# Altium PCB Dust1_carrier_6.PcbDoc
Units mm, origin at the board's own origin, x right, y up, seen from the top; angles counter-clockwise.
Board outline 20 x 20 mm, 6 copper layers (Top Layer (Signal), Layer 1 (GND), Layer 2 (Signal), Layer 3 (PWR), Layer 4 (GND), Bottom Layer (Signal)), stack 1.49 mm thick; 39 components, 37 nets, 184 pads, 90 vias.
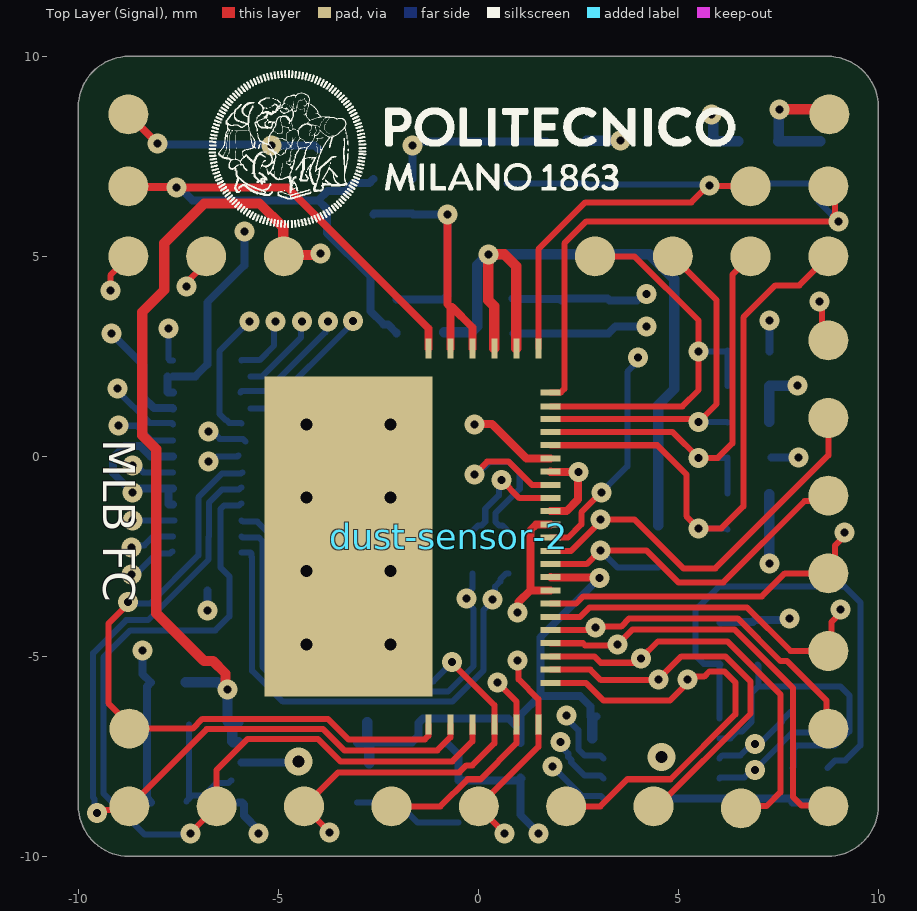
[diagram p0: Top Layer (Signal) view]
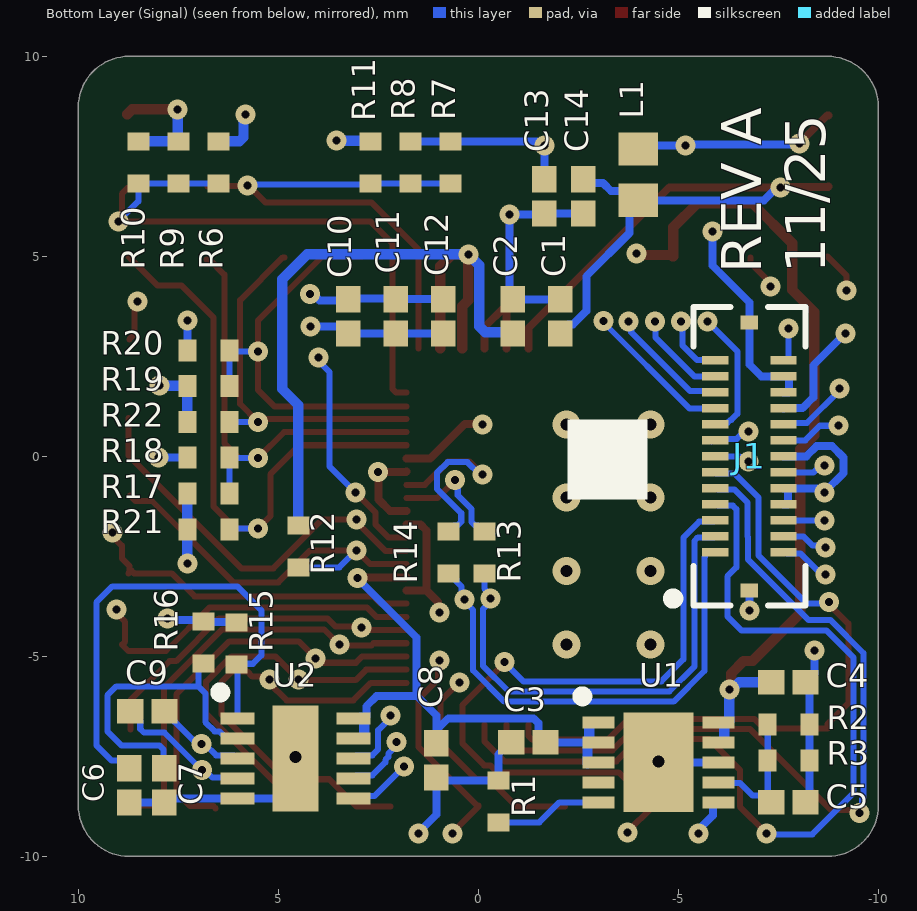
[diagram p1: Bottom Layer (Signal) view, seen from below]
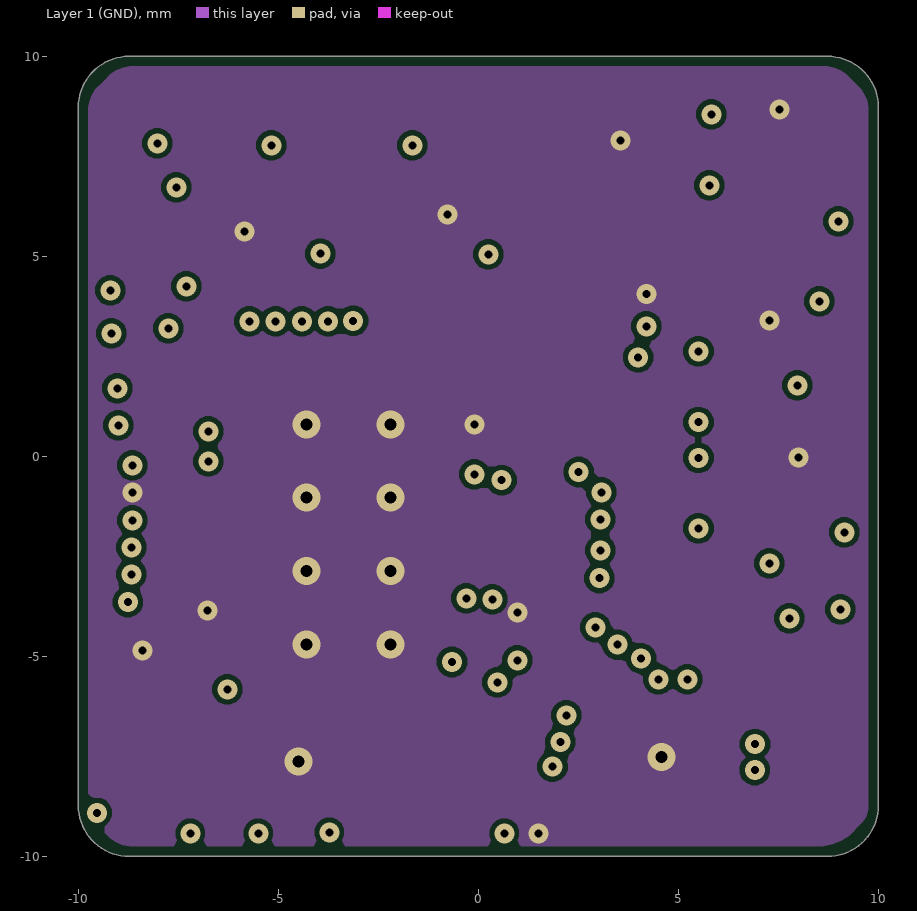
[diagram p2: Layer 1 (GND)]
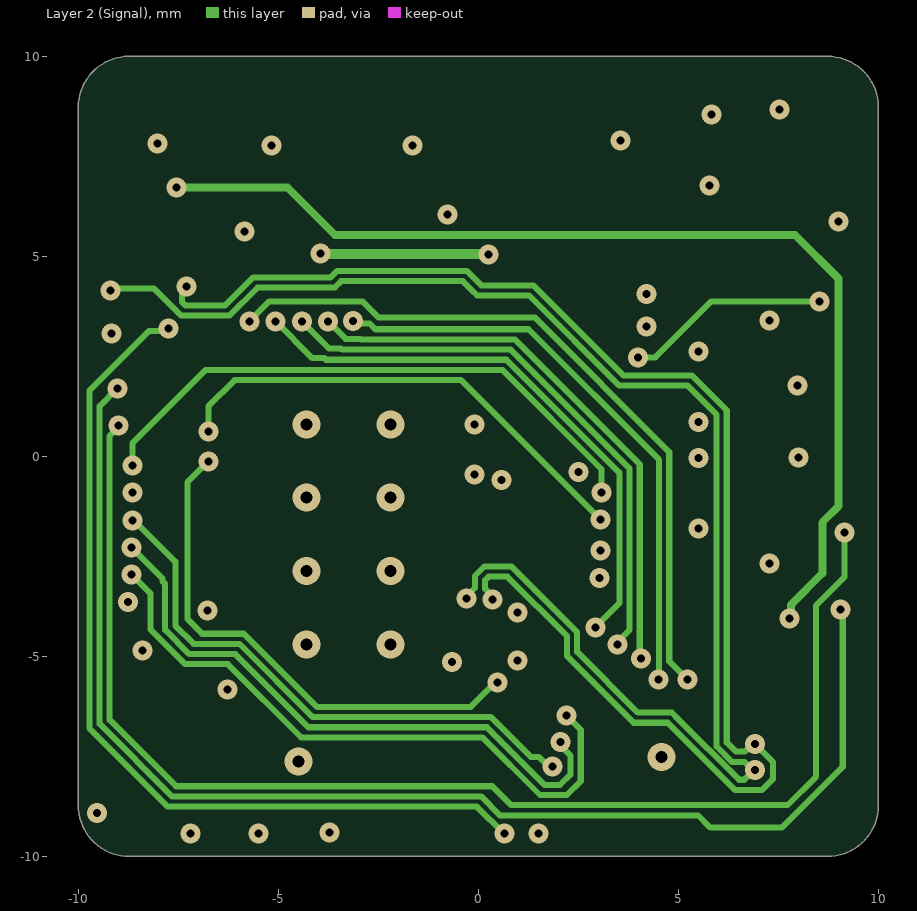
[diagram p3: Layer 2 (Signal)]
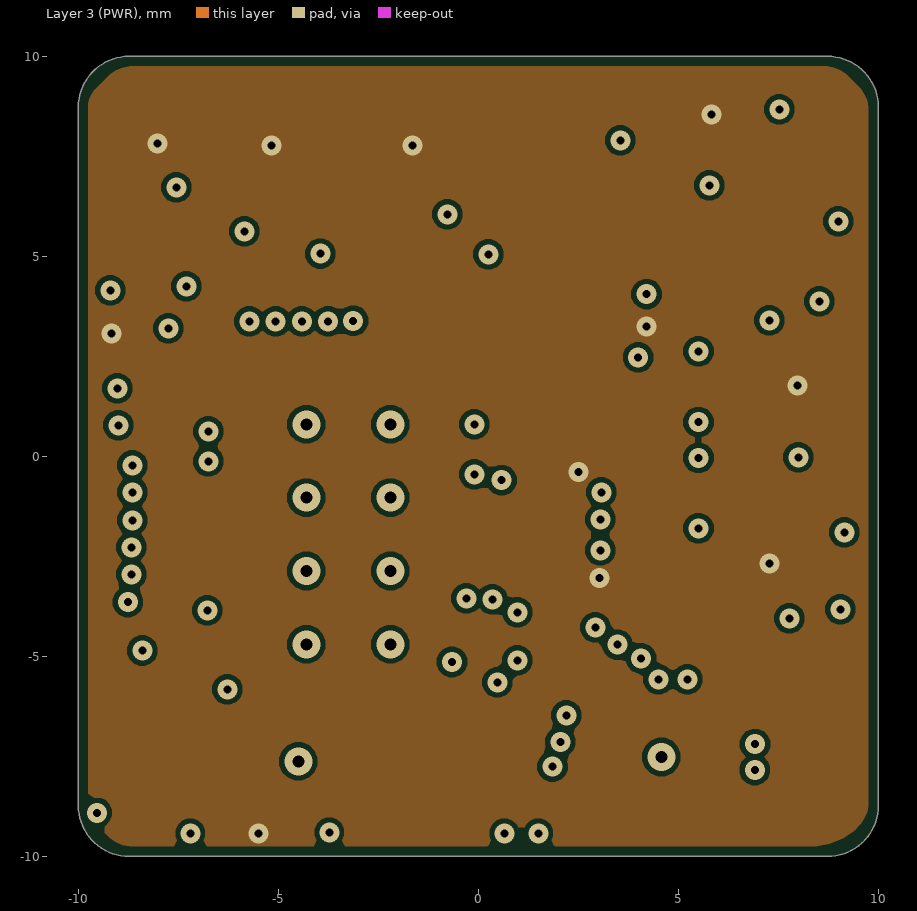
[diagram p4: Layer 3 (PWR)]
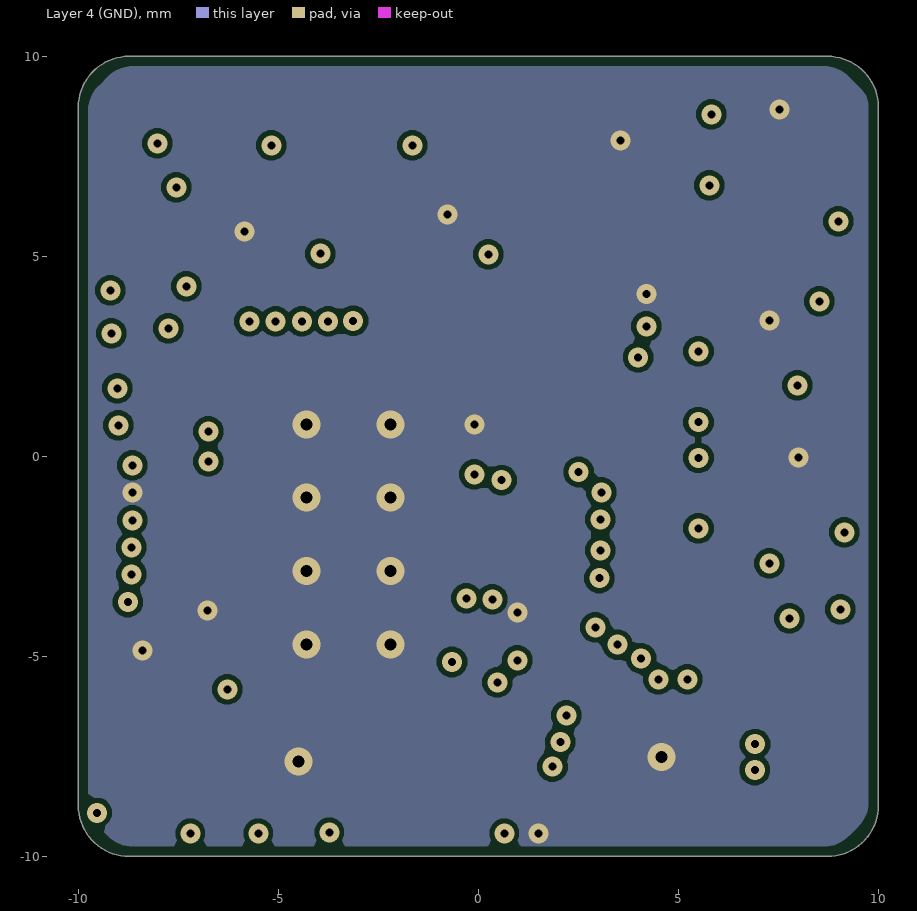
[diagram p5: Layer 4 (GND)]
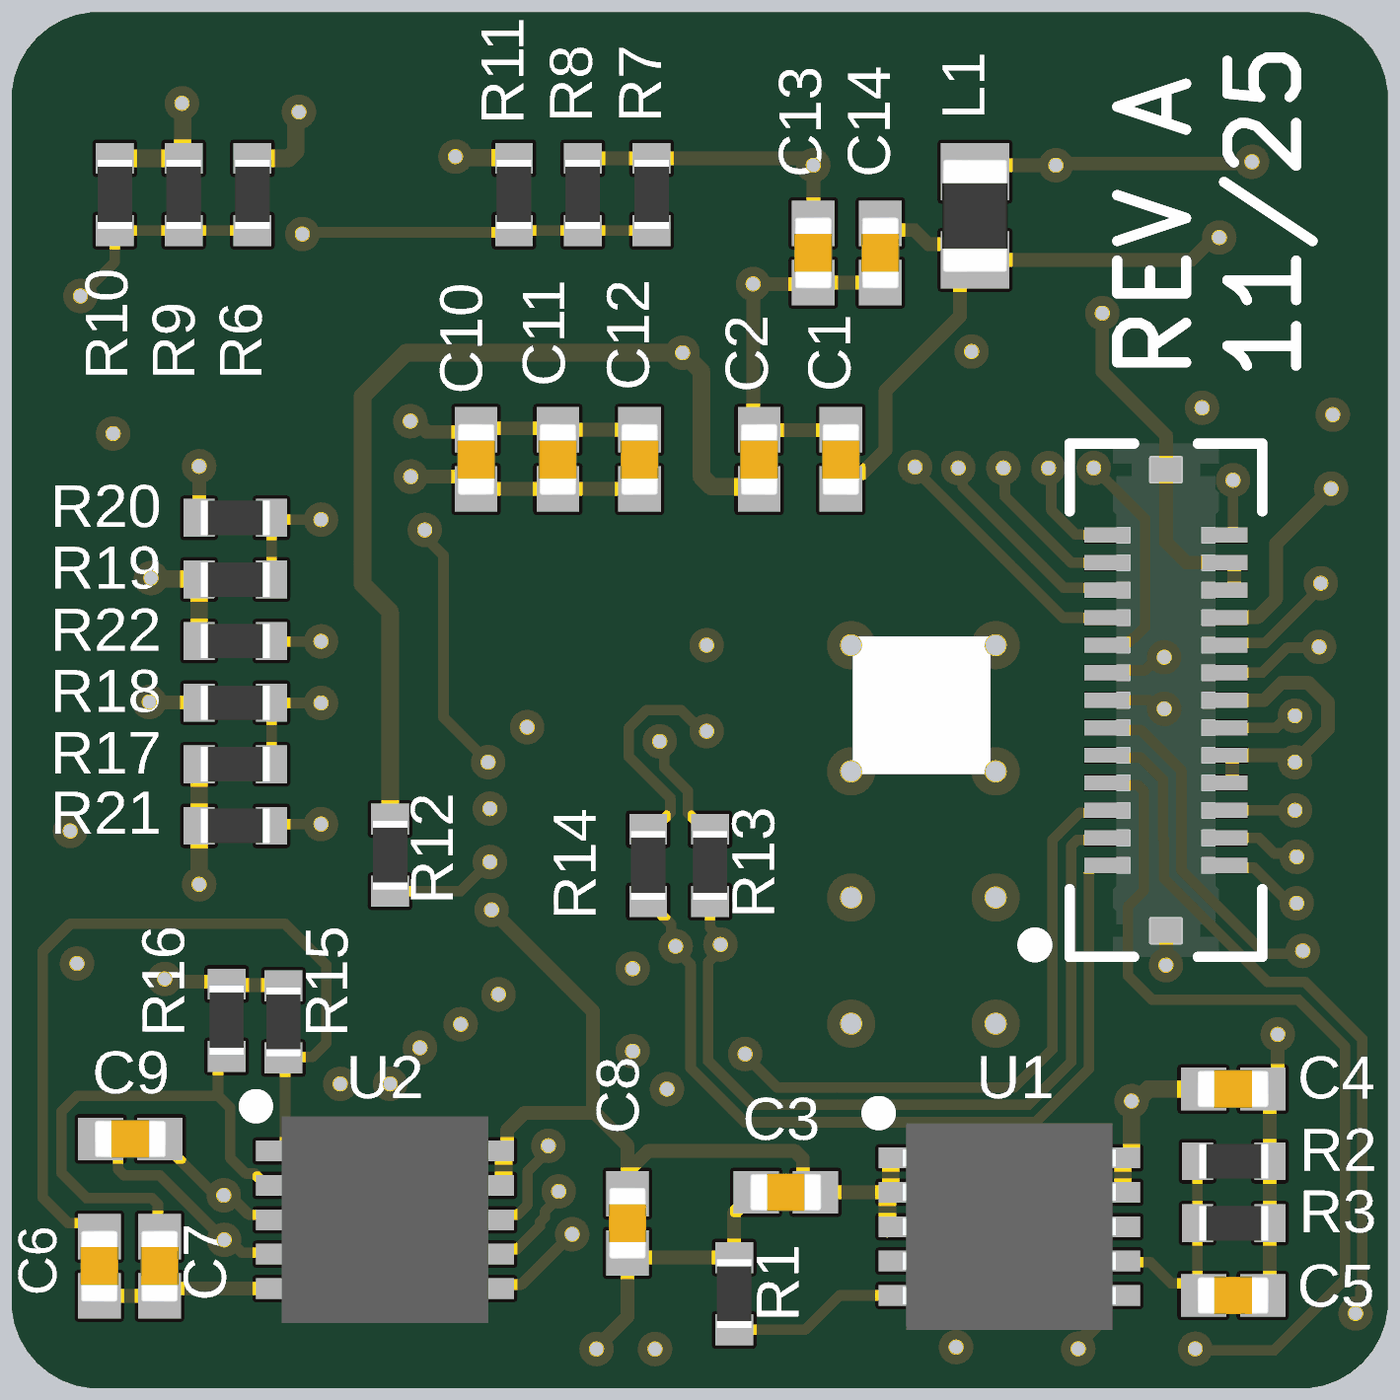
[diagram p6: 3D render of the assembled board from below, using the file's embedded part models]

## Layer stack, top to bottom
Top Solder: solder mask 0.0102, Solder Resist, Dk 3.5
Top Layer (Signal): signal copper 0.0175
Dielectric 2: prepreg 0.1295, PP-017, Dk 4.45
Layer 1 (GND): signal copper 0.035
Dielectric 4: core 0.43, Core-034, Dk 4.6
Layer 2 (Signal): signal copper 0.035
Dielectric 1: prepreg 0.196, PP-021, Dk 4.74
Layer 3 (PWR): signal copper 0.035
Dielectric 5: core 0.43, Core-034, Dk 4.6
Layer 4 (GND): signal copper 0.035
Dielectric 3: prepreg 0.1295, PP-017, Dk 4.45
Bottom Layer (Signal): signal copper 0.0175
Bottom Solder: solder mask 0.0102, Solder Resist, Dk 3.5

## Board outline
-10,-8.73 -10,8.73 cw(c-8.73,8.73) -8.73,10 8.73,10 cw(c8.73,8.73) 10,8.73 10,-8.73 cw(c8.73,-8.73) 8.73,-10 -8.73,-10 cw(c-8.73,-8.73)

## Design rules (kind name [scope] priority, off if disabled: settings)
BoardOutlineClearance [All] p1: gap=0.2 ignorepadtopadclearanceinfootprint=FALSE
Clearance [All] p1: gap=0.102 ignorepadtopadclearanceinfootprint=TRUE except(0.127: Arc-Via Track-Via SMDPad-Via THPad-Via Via-Via Via-Fill Via-Poly Via-Region Via-Text; 0.254: Arc-Hole Track-Hole SMDPad-Hole THPad-Hole Via-Hole Fill-Hole Poly-Hole Region-Hole Text-Hole)
ComponentClearance [All] p1: gap=0.089 collisioncheckmode=3 verticalgap=0.089 showdistances=TRUE
DiffPairsRouting [All] p1: maxlimit=0.305 minlimit=0.102 mostfreqgap=0.102 toplayer_maxgap=0.305 toplayer_minwidth=0.152 toplayer_maxwidth=25.4 toplayer_prefwidth=0.152 midlayer1_minwidth=0.152 midlayer1_maxwidth=25.4 midlayer1_prefwidth=0.152 midlayer2_minwidth=0.152 midlayer2_maxwidth=25.4 midlayer2_prefwidth=0.152 midlayer3_minwidth=0.152 midlayer3_maxwidth=25.4 midlayer3_prefwidth=0.152 midlayer4_minwidth=0.152 midlayer4_maxwidth=25.4 midlayer4_prefwidth=0.152 bottomlayer_minwidth=0.152 bottomlayer_maxwidth=25.4 bottomlayer_prefwidth=0.152 maxuncoupledlength=12.7
Height [All] p1: minheight=0 maxheight=1816.048 prefheight=12.7
HoleSize [All] p1: absolutevalues=TRUE maxlimit=6.3 minlimit=0.2 maxpercent=80.000 minpercent=20.000
HoleToHoleClearance [All] p1: gap=0.254 allowstackedmicrovias=FALSE
MinimumAnnularRing [All] p1: minimumring=0.15
MinimumSolderMaskSliver [All] p1: minsoldermaskwidth=0.152
PlaneClearance [All] p1: clearance=0.089
PlaneConnect PlaneConnectPowerPads [InPadClass('PowerPads')] p1: planeconnectstyle=Direct reliefexpansion=0.508 reliefentries=4 reliefconductorwidth=0.254 reliefairgap=0.254
PlaneConnect [All] p2: pad.planeconnectstyle=Relief pad.reliefexpansion=0.3 pad.reliefentries=4 pad.reliefconductorwidth=0.089 pad.reliefairgap=0.089 via.planeconnectstyle=Direct via.reliefexpansion=0.3 via.reliefentries=4 via.reliefconductorwidth=0.127 via.reliefairgap=0.127
PolygonConnect PolygonConnectPowerPads [All vs (InPadClass('PowerPads'))] p1: connectstyle=Direct reliefconductorwidth=0.254 reliefentries=4 polygonreliefangle="90 Angle" airgapwidth=0.254
PolygonConnect [All] p2: thpad.connectstyle=Relief thpad.reliefconductorwidth=0.089 thpad.reliefentries=4 thpad.polygonreliefangle="90 Angle" thpad.airgapwidth=0.089 smdpad.connectstyle=Relief smdpad.reliefconductorwidth=0.089 smdpad.reliefentries=4 smdpad.polygonreliefangle="90 Angle" smdpad.airgapwidth=0.089 via.connectstyle=Direct via.reliefconductorwidth=0.127 via.reliefentries=4 via.polygonreliefangle="90 Angle" via.airgapwidth=0.127
RoutingVias [All] p1: holewidth=0.2 width=0.45 viastyle="Through Hole" minholewidth=0.2 minwidth=0.45 maxholewidth=6.3 maxwidth=6.55
SilkToSilkClearance [All] p1: silktosilkclearance=0.127
SilkToSolderMaskClearance [IsPad] p1: minsilkscreentomaskgap=0.127 clearancetoexposedcopper=TRUE
SolderMaskExpansion [All] p1: expansion=0.051 istentingtop=FALSE
SupplyNets "Schematic Supply Nets_1" [InNet('TV+')] p1: voltage=0.000
SupplyNets "Schematic Supply Nets" [InNet('GND')] p2: voltage=0.000
UnRoutedNet [All] p1: checkbadconnections=TRUE
Width Power_12mil [InNetClass('Power')] p1: maxlimit=25.4 minlimit=0.2 preferedwidth=0.305 minimp=50.000000 maximp=50.000000 favimp=50.000000
Width Power_20mil [InNetClass('Power')] p2: maxlimit=25.4 minlimit=0.508 preferedwidth=0.508 minimp=50.000000 maximp=50.000000 favimp=50.000000
Width Width_6mil [InNetClass('Signal')] p3: maxlimit=25.4 minlimit=0.152 preferedwidth=0.152 minimp=50.000000 maximp=50.000000 favimp=50.000000
Width Width_3.5mil [InNetClass('Signal')] p4: maxlimit=25.4 minlimit=0.089 preferedwidth=0.089 minimp=50.000000 maximp=50.000000 favimp=50.000000
19 further rules are at their usual default settings.

## Classes and differential pairs
component class Dust1_carrier_6: C1 C2 C3 C4 C5 C6 C8 C9 C10 C11 C12 C13 dust-sensor-2 J1 L1 R1 R2 R3 R6 R7 R8 R9 R10 R11 R12 R13 R14 R15 R16 R17 R18 R19 R20 R21 R22 U1 U2
differential pair OUT1: +OUT1_P -OUT1_N
differential pair OUT: +OUT_P -OUT_N

## Components (designator, comment, footprint, x,y, rotation, side; value= is the part's Value field where it differs from the comment)
C1 "10uF" CAP_0402 -2.05,3.5 r90 bottom
C2 "10uF" CAP_0402 -0.863,3.5 r90 bottom
C3 "4.7uF" CAP_0402 -1.25,-7.15 r180 bottom
C4 "10uF" CAP_0402 -7.75,-5.65 r180 bottom
C5 "4.7uF" CAP_0402 -7.75,-8.65 r0 bottom
C6 "10uF" CAP_0402 8.725,-8.225 r90 bottom
C7 "1uF" CAP_0402 7.85,-8.225 r90 bottom
C8 "1uF" CAP_0402 1.05,-7.6 r270 bottom
C9 "10nF" CAP_0402 8.275,-6.375 r0 bottom
C10 "10uF" CAP_0402 3.25,3.5 r270 bottom
C11 "100nF" CAP_0402 2.062,3.5 r270 bottom
C12 "10uF" CAP_0402 0.875,3.5 r270 bottom
C13 "10uF" CAP_0402 -1.65,6.5 r90 bottom
C14 "10uF" CAP_0402 -2.625,6.5 r90 bottom
dust-sensor-2 "dust-sensor-2" dust-sensor-2-Footprint-1 -1.25,-2 r0 top
J1 "5024302630" CON_5024302630_MOL -6.775,0 r90 bottom
L1 "IND_0603" IND_0603 -4,7.04 r270 bottom
R1 "0Ω" RES_0402 -0.5,-8.625 r270 bottom
R2 "33.2kΩ" RES_0402 -7.76,-6.7 r0 bottom
R3 "33.2kΩ" RES_0402 -7.76,-7.6 r0 bottom
R6 "DNP" RES_0402 6.5,7.35 r90 bottom
R7 "DNP" RES_0402 0.7,7.35 r90 bottom
R8 "DNP" RES_0402 1.7,7.35 r90 bottom
R9 "DNP" RES_0402 7.5,7.35 r270 bottom
R10 "DNP" RES_0402 8.5,7.35 r270 bottom
R11 "DNP" RES_0402 2.7,7.35 r270 bottom
R12 "DNP" RES_0402 4.5,-2.25 r270 bottom
R13 "0Ω" RES_0402 -0.15,-2.4 r90 bottom
R14 "0Ω" RES_0402 0.75,-2.4 r90 bottom
R15 "5Ω" RES_0402 6.05,-4.675 r90 bottom
R16 "5Ω" RES_0402 6.875,-4.65 r90 bottom
R17 "DNP" RES_0402 6.75,-0.93 r0 bottom
R18 "DNP" RES_0402 6.75,-0.035 r180 bottom
R19 "DNP" RES_0402 6.75,1.755 r0 bottom
R20 "DNP" RES_0402 6.75,2.65 r180 bottom
R21 "DNP" RES_0402 6.75,-1.825 r0 bottom
R22 "DNP" RES_0402 6.75,0.86 r0 bottom
U1 "LT3045IDD#PBF" SON50P300X300X80-11N-D -4.5,-7.65 r180 bottom
U2 "ADS8867IDRCT" SON50P300X300X100-11N-D 4.575,-7.55 r180 bottom

## Footprints (in the part's own frame and the unit in brackets; to place one, negate y for a bottom-side part, rotate by r counter-clockwise, add the part's x,y. Pads: shape width x height; smd on the part's side, far side on the other; paste and mask are expansions set on the pad)
CAP_0402 [mm] "Chip Capacitor, 2-Leads, Body 1.00x0.50mm, IPC Medium Density"
  rect 0.66x0.62 smd: 1(-0.43,0) 2(0.43,0)
  body extent -0.53,-0.28 0.53,0.28, height 0.4
CON_5024302630_MOL [mm]
  rect 0.22x0.66 smd paste+0 mask+0.012: 1(-2.4,0.855) 2(-2,0.855) 3(-1.6,0.855) 4(-1.2,0.855) 5(-0.8,0.855) 6(-0.4,0.855) 7(0,0.855) 8(0.4,0.855) 9(0.8,0.855) 10(1.2,0.855) 11(1.6,0.855) 12(2,0.855) 13(2.4,0.855) 14(-2.4,-0.855) 15(-2,-0.855) 16(-1.6,-0.855) 17(-1.2,-0.855) 18(-0.8,-0.855) 19(-0.4,-0.855) 20(0,-0.855) 21(0.4,-0.855) 22(0.8,-0.855) 23(1.2,-0.855) 24(1.6,-0.855) 25(2,-0.855) 26(2.4,-0.855)
  rect 0.35x0.44 smd paste+0 mask+0.025: P1(-3.35,0) P2(3.35,0)
  silkscreen extent -3.73,-1.4 3.73,2.03, body extent -3.73,-1.04 3.73,1.04, height 0.02
dust-sensor-2-Footprint-1 [mm]
  rect 4.2x8 smd paste-20: 0(-2,0)
  rect 0.15x0.5 smd paste-10: 1(0,4.7) 2(0.55,4.7) 3(1.1,4.7) 4(1.65,4.7) 5(2.2,4.7) 6(2.75,4.7) 30(2.75,-4.7) 31(2.2,-4.7) 32(1.65,-4.7) 33(1.1,-4.7) 34(0.55,-4.7) 35(0,-4.7)
  rect 0.5x0.15 smd paste-10: 7(3.05,3.6) 8(3.05,3.25) 9(3.05,2.937) 10(3.05,2.607) 11(3.05,2.277) 12(3.05,1.947) 13(3.05,1.617) 14(3.05,1.287) 15(3.05,0.957) 16(3.05,0.627) 17(3.05,0.297) 18(3.05,-0.033) 19(3.05,-0.363) 20(3.05,-0.693) 21(3.05,-1.023) 22(3.05,-1.353) 23(3.05,-1.683) 24(3.05,-2.013) 25(3.05,-2.343) 26(3.05,-2.673) 27(3.05,-3.003) 28(3.05,-3.333) 29(3.05,-3.663)
  body extent -3.6,-3.4 -0.4,3.4, height 0.8
IND_0603 [mm] "Chip Inductor, 2-Leads, Body 1.55x0.85mm, IPC Medium Density"
  rect 0.83x0.99 smd: 1(-0.64,0) 2(0.64,0)
  body extent -0.82,-0.48 0.82,0.48, height 0.5
RES_0402 [mm] "Chip Resistor, 2-Leads, Body 1.00x0.50mm, IPC Medium Density"
  rect 0.45x0.55 smd: 1(-0.525,0) 2(0.525,0)
  body extent -0.5,-0.25 0.5,0.25, height 0.3
SON50P300X300X80-11N-D [mm]
  rect 0.8x0.3 smd: 1(-1.5,1) 2(-1.5,0.5) 3(-1.5,0) 4(-1.5,-0.5) 5(-1.5,-1) 6(1.5,-1) 7(1.5,-0.5) 8(1.5,0) 9(1.5,0.5) 10(1.5,1)
  rect 1.75x2.48 smd: 11(0,0)
  silkscreen extent -2.02,1.53 -1.78,1.77, body extent -1.55,-1.5 1.55,1.5, height 0.8
SON50P300X300X100-11N-D [mm]
  rect 0.85x0.3 smd: 1(-1.45,1) 2(-1.45,0.5) 3(-1.45,0) 4(-1.45,-0.5) 5(-1.45,-1) 6(1.45,-1) 7(1.45,-0.5) 8(1.45,0) 9(1.45,0.5) 10(1.45,1)
  rect 1.15x2.65 smd: 11(0,0)
  silkscreen extent -2,1.53 -1.75,1.77, body extent -1.5,-1.5 1.5,1.5, height 1

## Part data
C1 C2 C3 C4 C5 C6 C7 C8 C9 C10 C11 C12 C13 C14: library part CMP-001-00099-1, Design Item ID=CAP_0402, Source=CAP_0402.SchLib
dust-sensor-2: library part CMP-010-00025-11, "dust-sensor-v2-2025"
J1: library part CMP-097-000000-5, "SlimStack Board-to-Board Plug, 0.40mm Pitch, Surface Mount, Dual Row, Vertical Stacking, 1.00mm Stacking Height, with Solder Tabs, with Vacuum  Tape, 26 Circuits", Manufacturer_Name="Molex Connector Corporation", Copyright="Copyright (C) 2025 Ultra Librarian. All rights reserved.", Design Item ID=5024302630, Manufacturer_Part_Number=5024302630, RefDes=RefDes, Source=5024302630.SchLib, Type=Type
L1: library part CMP-006-00026-1, "Generic 0603 Inductor", Design Item ID=IND_0603, Source=IND_0603.SchLib
R1 R2 R3 R6 R7 R8 R9 R10 R11 R12 R13 R14 R15 R16 R17 R18 R19 R20 R21 R22: library part CMP-009-00192-1, "Resistor SMD 0402 Generic", Design Item ID=RES_0402, Source=RES_0402.SchLib
U1: library part CMP-111-000001-2, "Linear Technology LT3045IDD#PBF, LDO Regulator, 500mA Adjustable, 0  15 V, +/-1% 10-Pin, DFN", Manufacturer_Name="Analog Devices", Mouser Part Number=584-LT3045IDD#PBF, Arrow Part Number=LT3045IDD#PBF, Arrow Price/Stock=https://www.arrow.com/en/products/lt3045iddpbf/analog-devices?utm_currency=USD&region=nac, Datasheet Link=https://www.analog.com/media/en/technical-documentation/data-sheets/3045fa.pdf, Design Item ID=LT3045IDD#PBF, Geometry.Height=0.8mm, Manufacturer_Part_Number=LT3045IDD#PBF, Mouser Price/Stock=https://www.mouser.co.uk/ProductDetail/Analog-Devices/LT3045IDDPBF?qs=oahfZPh6IAL0HQTYgxXgGA%3D%3D, Source=LT3045IDD#PBF.SchLib
U2: library part CMP-00018-2, "16-Bit, 100-kSPS, Serial Interface, microPower, Miniature, Truly-Differential Input, SAR ADC", Manufacturer_Name="Texas Instruments", Mouser Part Number=595-ADS8867IDRCT, Datasheet Link=http://www.ti.com/lit/gpn/ADS8867, Design Item ID=ADS8867IDRCT, Geometry.Height=1mm, Manufacturer_Part_Number=ADS8867IDRCT, Mouser Price/Stock=https://www.mouser.co.uk/ProductDetail/Texas-Instruments/ADS8867IDRCT?qs=P6JsaOY39iimBkK0NU%2FcVg%3D%3D, Source=ADS8867IDRCT.SchLib

## Free pads (board coordinates)
  round 1 smd paste-2539.97: ""(-8.75,5) ""(-8.75,6.75) ""(-8.75,8.55) ""(-8.725,-8.75) ""(-8.725,-6.808) ""(-6.806,5) ""(-6.541,-8.75) ""(-4.861,5) ""(-4.356,-8.75) ""(-2.172,-8.75) ""(0.013,-8.75) ""(2.197,-8.75) ""(2.917,5) ""(4.381,-8.75) ""(4.861,5) ""(6.566,-8.8) ""(6.806,5) ""(6.806,6.75) ""(8.75,-6.808) ""(8.75,-4.867) ""(8.75,0.958) ""(8.75,-2.925) ""(8.75,-0.983) ""(8.75,-8.75) ""(8.75,2.9) ""(8.75,5) ""(8.75,6.75) ""(8.775,8.55)

## Via types
v1: diameter 0.5, hole 0.2, Top Layer (Signal) to Bottom Layer (Signal), tented both sides, 80 vias
v2: diameter 0.7, hole 0.3, Top Layer (Signal) to Bottom Layer (Signal), tented bottom, 8 vias
v3: diameter 0.7, hole 0.3, Top Layer (Signal) to Bottom Layer (Signal), tented top, 2 vias

## Nets (pads, with @x,y where several pads share a name; then routed paths per layer and width w, separated by ;. In a path a pad name is that pad's centre, name@x,y a point inside that pad or via, vN(x,y) a via of type N, cw(c..) or ccw(c..) an arc to the next point about the centre after c; other vN are vias at no path point)
2CKpad: dust-sensor-2.35 J1.6 pad.@-8.725,-6.808 | length 16.8
  Top Layer (Signal) w0.152: v1(-8.763,-3.643) -8.763,-3.695 -9.25,-4.182 -9.25,-6.17 -8.725,-6.695 -8.725,-6.808 -7.143,-6.808 -6.898,-6.564 -3.761,-6.564 -3.25,-7.075 -1.339,-7.075 -1.25,-6.986 dust-sensor-2.35
  Bottom Layer (Signal) w0.152: v1(-8.763,-3.643) -8.723,-3.683 -8.208,-3.683 -7,-2.475 -7,-1.025 -6.409,-0.434 -5.934,-0.434 J1.6@-5.9,-0.4
CKpad: dust-sensor-2.34 J1.5 pad.@-8.725,-8.75 | length 20.7
  Top Layer (Signal) w0.152: v1(-9.53,-8.911) -9.464,-8.844 -8.819,-8.844 -6.793,-6.818 -3.882,-6.818 -3.35,-7.35 -1.025,-7.35 -0.7,-7.025 dust-sensor-2.34
  Bottom Layer (Signal) w0.152: v1(-9.53,-8.911) -9.597,-8.844 -9.597,-8.563 -9.629,-8.53 -9.629,-4.92 -8.805,-4.096 -8.258,-4.096 -6.746,-2.584 -6.746,-2.021 -6.734,-2.009 -6.734,-1.159 -6.409,-0.834 -5.984,-0.834 J1.5@-5.925,-0.775
DCC_counter: dust-sensor-2.32 J1.3 pad.@-4.356,-8.75 | length 17.7
  Top Layer (Signal) w0.152: v1(-3.725,-9.4) -3.725,-9.391 -4.356,-8.759 -4.356,-8.75 -3.506,-7.9 -0.475,-7.9 -0.3,-7.725 -0.146,-7.725 0.4,-7.179 dust-sensor-2.32 0.4,-6.221 -0.659,-5.162 v1(-0.659,-5.141)
  Bottom Layer (Signal) w0.152: J1.3 -5.886,-1.634 -5.524,-1.634 -5.125,-2.033 -5.125,-5.075 -4.575,-5.625 -1.125,-5.625 -0.659,-5.159 v1(-0.659,-5.141)
DCC_sel: dust-sensor-2.31 J1.7 pad.@-2.172,-8.75 | length 19.2
  Top Layer (Signal) w0.152: pad.@-2.172,-8.75 -0.946,-8.75 -0.268,-8.072 0.056,-8.072 0.95,-7.179 dust-sensor-2.31@0.95,-6.874 ; v1(0.476,-5.651) 0.95,-6.125 dust-sensor-2.31
  Layer 2 (Signal) w0.152: v1@-6.775,-0.15 -7.275,-0.65 -7.275,-4.064 -6.904,-4.435 -5.865,-4.435 -4.036,-6.264 -0.189,-6.264 0.424,-5.651 v1(0.476,-5.651)
  Bottom Layer (Signal) w0.152: v1(-6.75,-0.125) -6.656,-0.125 -6.531,0 -6.025,0 J1.7@-6,0.025
Gm_Ca: dust-sensor-2.9 pad.@4.861,5 R22.1 | length 9.2
  Top Layer (Signal) w0.152: dust-sensor-2.9 5.328,0.937 5.39,0.875 v1@5.5,0.875 ; pad.@4.85,4.975 4.886,4.975 5.957,3.904 5.957,1.308 v1(5.504,0.855)
  Bottom Layer (Signal) w0.152: v1(5.504,0.855) 6.22,0.855 R22.1@6.225,0.85
Gm_Cb: dust-sensor-2.8 pad.@2.917,5 R19.1 R20.2 | length 10.5
  Top Layer (Signal) w0.152: dust-sensor-2.8 5.1,1.25 5.504,1.654 v1(5.504,2.625) 5.504,3.399 3.909,4.994 pad.@2.906,4.994
  Bottom Layer (Signal) w0.152: v1(5.504,2.625) R20.2@6.225,2.625 ; R19.1 R20.2
GND: C1.2 C2.2 C3.1 C4.2 C5.1 C6.1 C7.1 C8.2 C10.1 C11.1 C12.1 C13.1 C14.1 dust-sensor-2.0 dust-sensor-2.2 dust-sensor-2.3 dust-sensor-2.12 dust-sensor-2.17 dust-sensor-2.22 J1.17 J1.18 J1.20 J1.24 J1.25 J1.P1 J1.P2 pad.@8.775,8.55 R1.1 R2.1 R3.1 R9.1 R10.1 R11.1 R18.1 R20.1 U1.8 U1.11 U2.5 U2.11 | length 48.2
  Top Layer (Signal) w0.2: v1(-0.775,6.05) -0.775,3.809 -0.7,3.734 dust-sensor-2.2 ; -0.659,3.734 -0.15,3.225 dust-sensor-2.3 ; v1@-0.05,0.825 -0.036,0.811 0.339,0.811 1.203,-0.053 dust-sensor-2.12 ; v1@0.95,-3.9 1.007,-3.843 1.007,-3.643 1.298,-3.351 dust-sensor-2.22 dust-sensor-2.22 ; 1.3,-3.35 1.3,-1.85 1.447,-1.703 dust-sensor-2.17
  Top Layer (Signal) w0.254: v1(7.525,8.675) 8.65,8.675 pad.@8.775,8.55
  Bottom Layer (Signal) w0.2: v1(-8.4,-4.856) -8.4,-5.44 -8.19,-5.65 C4.2 -8.285,-5.755 R3.1 ; R3.1@-8.285,-7.64 -8.285,-8.545 C5.1 ; J1.25@-7.775,2 -7.765,1.99 -7.765,1.61 -7.755,1.6 J1.24 ; J1.18@-7.74,-0.81 -7.74,-1.19 -7.73,-1.2 J1.17 ; J1.18@-7.74,-0.8 J1.18 -8.469,-0.8 -8.569,-0.9 v1(-8.65,-0.9) -9.127,-0.423 -9.127,-0.027 -8.848,0.252 -8.452,0.252 -8.2,0 J1.20 ; J1.25 -7.075,2 -6.775,2.3 J1.P2 -6.775,3.85 -5.85,4.775 v1(-5.85,5.625) ; v1(-6.775,-3.85) J1.P1 ; U1.8@-5.915,-7.65 U1.11 v3(-4.5,-7.625) ; C14.1@-2.625,6.05 -2.605,6.07 C13.1 -1.63,6.05 v1(-0.775,6.05) -0.775,4.017 C2.2 ; C1.2@-2.05,3.925 C2.2@-0.85,3.925 ; C3.1@-0.8,-7.175 -0.775,-7.175 -0.5,-7.45 R1.1 1.025,-8.1 C8.2@1.075,-8.05 ; C12.1@0.85,3.95 0.87,3.93 C11.1 ; C8.2 1.05,-8.959 1.5,-9.409 v1(1.5,-9.428) ; C11.1@2.075,3.9 2.125,3.95 3.23,3.95 3.28,3.9 3.969,3.9 4.125,4.056 v1(4.206,4.056) ; U2.11@4.625,-8.525 4.65,-8.55 U2.5 C7.1@7.85,-8.55 ; R20.1@7.275,2.625 v1(7.275,3.4) ; R18.1@7.325,-0.025 7.33,-0.03 7.995,-0.03 v1(8,-0.025) ; C7.1 C6.1@8.75,-8.655
  Bottom Layer (Signal) w0.254: R11.1 2.713,7.888 3.538,7.888 v1(3.55,7.9) ; v1(7.525,8.675) 7.512,8.662 7.512,7.887 R9.1 R10.1@8.55,7.875
  other v1: 0.975,-3.9 -0.1,0.8
  other v2: -4.3,-4.7 -2.2,-4.7 -4.3,-2.867 -2.2,-2.867 -4.3,-1.033 -2.2,-1.033 -4.3,0.8 -2.2,0.8
  other v3: 4.575,-7.519
HFb1: dust-sensor-2.23 J1.21 pad.@8.75,-2.925 | length 42.6
  Top Layer (Signal) w0.152: dust-sensor-2.23 2.442,-3.683 2.625,-3.5 7.091,-3.5 7.666,-2.925 8.604,-2.925 pad.@8.629,-2.9 ; pad.@8.75,-2.925 8.677,-2.852 8.717,-2.852 8.717,-2.745 8.912,-2.549 8.912,-2.232 9.15,-1.994 v1(9.15,-1.9)
  Layer 2 (Signal) w0.152: v1(-9,0.775) -9,0.728 -9.216,0.512 -9.216,-6.586 -7.554,-8.248 0.348,-8.248 0.821,-8.721 7.729,-8.721 8.444,-8.006 8.444,-3.725 9.15,-3.018 v1(9.15,-1.9)
  Bottom Layer (Signal) w0.152: v1(-9,0.775) -8.989,0.764 -8.539,0.764 -8.175,0.4 J1.21
HFb2: dust-sensor-2.24 J1.22 pad.@8.75,-4.867 | length 43.4
  Top Layer (Signal) w0.152: dust-sensor-2.24 2.546,-4.013 2.784,-3.775 6.716,-3.775 7.808,-4.867 8.75,-4.867 8.908,-4.708 8.831,-4.631 8.831,-4.138 9.05,-3.919 v1(9.05,-3.825)
  Layer 2 (Signal) w0.152: v1(-9.025,1.7) -9.47,1.255 -9.47,-6.691 -7.659,-8.502 0.068,-8.502 0.541,-8.975 5.492,-8.975 5.802,-9.284 7.591,-9.284 9.111,-7.764 9.111,-3.887 v1(9.05,-3.825)
  Bottom Layer (Signal) w0.152: v1(-9.025,1.7) -9.025,1.642 -8.217,0.834 -7.664,0.834 J1.22
NetC5_2: C5.2 R2.2 R3.2 U1.7 | length 3.3
  Bottom Layer (Signal) w0.152: R3.2 -7.235,-8.56 -7.3,-8.625 -7.151,-8.476 -6.851,-8.476 -6.539,-8.164 -6.241,-8.164 U1.7@-6.177,-8.1 ; R3.2@-7.235,-7.565 R2.2
NetC6_2: C6.2 R15.1 U2.1 | length 12.4
  Bottom Layer (Signal) w0.152: U2.1 R15.1@6.025,-5.2 ; R15.1 6.036,-5.186 5.636,-5.186 5.425,-4.975 5.425,-3.85 6.025,-3.25 9.15,-3.25 9.55,-3.65 9.55,-7.225 9.174,-7.601 8.919,-7.601 C6.2
NetC7_2: C7.2 R16.1 U2.2 | length 7.8
  Bottom Layer (Signal) w0.152: U2.2 6.3,-7.05 6.472,-6.878 6.593,-6.878 6.825,-6.646 6.825,-5.925 7,-5.75 ; R16.1@6.975,-5.2 7,-5.225 7,-5.75 ; C7.2 7.874,-7.771 7.874,-7.326 7.966,-7.234 8.916,-7.234 9.275,-6.875 9.275,-5.975 9.05,-5.75 7,-5.75
Netdust-sensor-2_20: dust-sensor-2.20 pad.@8.75,-0.983 R12.2 | length 9.9
  Top Layer (Signal) w0.152: dust-sensor-2.20 2.707,-2.693 v1@3.025,-2.375 ; v1(3.05,-2.35) 4.2,-2.35 5,-3.15 6.125,-3.15 8.158,-1.117 8.575,-1.117 pad.@8.708,-0.983
  Bottom Layer (Signal) w0.152: v1(3.05,-2.35) 3.475,-2.775 R12.2
NetR1_2: R1.2 U1.5 | length 2.7
  Bottom Layer (Signal) w0.152: U1.5@-3.029,-8.65 -2.025,-8.65 -1.525,-9.15 R1.2
OUT1_N: dust-sensor-2.15 R13.2 | length 3
  Top Layer (Signal) w0.152: v1(0.581,-0.597) 1.027,-1.043 dust-sensor-2.15
  Bottom Layer (Signal) w0.152: R13.2 -0.001,-1.726 0.084,-1.726 0.173,-1.637 0.173,-1.316 0.515,-0.974 0.515,-0.664 v1(0.581,-0.597)
OUT1_P: dust-sensor-2.14 R14.2 | length 5.5
  Top Layer (Signal) w0.152: v1(-0.1,-0.45) 0.218,-0.132 0.757,-0.132 1.338,-0.713 dust-sensor-2.14
  Bottom Layer (Signal) w0.152: v1(-0.1,-0.45) -0.035,-0.45 0.271,-0.144 0.769,-0.144 1.035,-0.41 1.035,-0.814 0.427,-1.421 0.427,-1.637 0.516,-1.726 0.601,-1.726 R14.2
OUT_N: C9.2 J1.2 pad.@-8.75,5 R13.1 U2.4 | length 53.6
  Top Layer (Signal) w0.152: v1(-9.2,4.15) -9.2,4.525 pad.@-8.725,5
  Layer 2 (Signal) w0.152: v1(-9.2,4.15) -9.15,4.2 -8.111,4.2 -7.428,3.517 -6.224,3.517 -5.52,4.221 -3.587,4.221 -3.43,4.378 -0.387,4.378 -0.179,4.17 -0.03,4.021 1.27,4.021 3.523,1.768 5.232,1.768 5.957,1.043 5.957,-7.255 6.34,-7.638 6.648,-7.638 6.851,-7.842 v1(6.911,-7.842) 6.893,-7.842 6.648,-8.087 6.522,-8.087 4.99,-6.556 4.842,-6.407 3.991,-6.407 2.472,-4.888 2.472,-4.397 0.828,-2.753 0.155,-2.753 -0.083,-2.991 -0.083,-3.287 -0.3,-3.503 v1(-0.3,-3.55)
  Bottom Layer (Signal) w0.152: J1.2 -5.892,-2.028 -5.489,-2.028 -5.4,-2.117 -5.4,-5.257 -4.778,-5.879 -0.756,-5.879 -0.121,-5.244 -0.121,-3.813 -0.3,-3.634 v1(-0.3,-3.55) -0.3,-3.456 -0.15,-3.306 R13.1 ; U2.4 6.045,-8.03 6.648,-8.03 6.836,-7.842 v1@6.922,-7.842 ; v1(6.911,-7.842) 7.849,-6.905 8.362,-6.905 8.451,-6.816 8.451,-6.609 8.685,-6.375 C9.2
OUT_P: C9.1 J1.1 pad.@-6.806,5 R14.1 U2.3 | length 52.1
  Top Layer (Signal) w0.152: v1(-7.3,4.25) -7.3,4.345 -6.8,4.845 pad.@-6.8,4.975
  Layer 2 (Signal) w0.152: v1(-7.3,4.25) -7.3,4.156 -7.413,4.043 -7.413,3.861 -7.323,3.771 -6.329,3.771 -5.625,4.475 -3.692,4.475 -3.535,4.632 -0.282,4.632 0.075,4.275 1.375,4.275 3.628,2.022 5.338,2.022 6.211,1.148 6.211,-7.15 6.446,-7.384 6.661,-7.384 6.851,-7.194 v1(6.917,-7.194) ; v1(0.35,-3.575) 0.35,-3.491 0.171,-3.312 0.171,-3.096 0.26,-3.007 0.723,-3.007 2.218,-4.502 2.218,-4.993 3.886,-6.661 4.736,-6.661 6.416,-8.341 7.093,-8.341 7.364,-8.07 7.364,-7.64 6.924,-7.2 6.923,-7.2 v1@6.917,-7.2
  Bottom Layer (Signal) w0.152: J1.1 -5.7,-2.4 -5.666,-2.434 -5.666,-2.511 -5.654,-2.523 -5.654,-5.363 -4.884,-6.133 -0.651,-6.133 0.133,-5.349 0.133,-3.838 0.35,-3.622 v1(0.35,-3.575) 0.417,-3.508 0.417,-3.258 0.551,-3.124 0.551,-3.074 0.7,-2.925 R14.1 ; U2.3 6.1,-7.475 6.554,-7.475 6.835,-7.194 v1(6.917,-7.194) ; v1@6.917,-7.2 6.989,-7.128 7.103,-7.128 7.591,-6.64 7.591,-6.609 7.825,-6.375 C9.1
OUTD: dust-sensor-2.33 J1.4 pad.@-6.541,-8.75 | length 22.4
  Top Layer (Signal) w0.152: v1(-7.2,-9.425) -7.2,-9.417 -6.541,-8.758 -6.541,-7.841 -5.772,-7.072 -4.003,-7.072 -3.45,-7.625 -0.65,-7.625 -0.15,-7.125 dust-sensor-2.33
  Bottom Layer (Signal) w0.152: v1(-7.2,-9.425) -7.225,-9.45 -8.35,-9.45 -9.375,-8.425 -9.375,-5.025 -8.7,-4.35 -6.575,-4.35 -6.225,-4 -6.225,-3 -6.45,-2.775 -6.45,-1.323 -6.361,-1.234 -5.984,-1.234 J1.4@-5.925,-1.175
RESET_ch_Read: dust-sensor-2.18 J1.19 pad.@8.75,2.9 | length 27.6
  Top Layer (Signal) w0.152: dust-sensor-2.18 2.242,-2.033 2.575,-1.7 2.575,-1.4 v1(3.075,-0.9) ; v1(8.525,3.875) 8.592,3.808 8.592,3.058 pad.@8.725,2.925
  Layer 2 (Signal) w0.152: v1(-8.65,-0.225) -8.65,0.325 -6.814,2.161 0.597,2.161 3.075,-0.317 v1(3.075,-0.9) ; v1(3.996,2.475) 4.425,2.475 5.825,3.875 v1@8.55,3.875
  Bottom Layer (Signal) w0.152: v1(-8.65,-0.225) -8.556,-0.225 -8.381,-0.4 J1.19 ; v1(3.075,-0.9) 3.725,-0.25 3.725,2.11 3.996,2.381 v1(3.996,2.475)
RESET_DCC: dust-sensor-2.19 J1.8 pad.@8.75,0.958 | length 23.1
  Top Layer (Signal) w0.152: dust-sensor-2.19 2.322,-2.363 3.025,-1.66 v1@3.025,-1.6 ; v1(3.05,-1.575) 3.9,-1.575 5.125,-2.8 5.925,-2.8 8.75,0.025 pad.@8.75,0.958
  Layer 2 (Signal) w0.152: v1(-6.75,0.625) -6.75,1.25 -6.093,1.907 -0.432,1.907 v1(3.05,-1.575)
  Bottom Layer (Signal) w0.152: v1(-6.75,0.625) -6.656,0.625 -6.465,0.434 -5.884,0.434 J1.8@-5.825,0.375
S0ck: dust-sensor-2.30 J1.26 pad.@0.013,-8.75 | length 28.9
  Top Layer (Signal) w0.152: pad.@0,-8.725 0,-8.758 0.65,-9.408 v1(0.65,-9.428) ; pad.@0.013,-8.75 1.5,-7.263 dust-sensor-2.30 1.5,-6.073 1.006,-5.579 1.006,-5.131 v1(0.975,-5.1)
  Layer 2 (Signal) w0.152: v1(-7.75,3.198) -7.811,3.137 -8.229,3.137 -9.724,1.642 -9.724,-6.796 -7.764,-8.756 -0.037,-8.756 0.635,-9.428 v1(0.65,-9.428)
  Bottom Layer (Signal) w0.152: v1(-7.75,3.198) -7.75,2.434 -7.716,2.4 J1.26
S1: dust-sensor-2.26 J1.12 pad.@8.75,-8.75 | length 26.9
  Top Layer (Signal) w0.152: dust-sensor-2.26 2.616,-4.673 2.671,-4.728 v1@3.472,-4.728 ; v1(3.475,-4.708) 3.858,-4.325 6.4,-4.325 7.863,-5.788 7.863,-8.513 8.075,-8.725 pad.@8.75,-8.725
  Layer 2 (Signal) w0.152: v1@-4.4,3.375 -4.4,3.362 -3.732,2.695 -3.435,2.695 -3.41,2.669 0.808,2.669 3.782,-0.306 3.782,-4.339 3.475,-4.646 v1(3.475,-4.708)
  Bottom Layer (Signal) w0.152: J1.12@-5.7,2 -5.4,2 -4.434,2.966 v1@-4.434,3.382
  other v1: -4.413,3.375
S2: dust-sensor-2.27 J1.11 pad.@6.566,-8.8 | length 27.4
  Top Layer (Signal) w0.152: dust-sensor-2.27 2.903,-5.003 3.062,-5.162 3.963,-5.162 v1@3.975,-5.15 ; v1@3.975,-5.142 v1(4.066,-5.05) 4.492,-4.625 6.225,-4.625 7.55,-5.95 7.55,-8.4 7.205,-8.745 6.621,-8.745 pad.@6.566,-8.8
  Layer 2 (Signal) w0.152: v1@-3.75,3.35 -3.731,3.35 -3.317,2.936 -2.955,2.936 -2.942,2.923 0.913,2.923 4.036,-0.2 4.036,-5.02 v1(4.066,-5.05)
  Bottom Layer (Signal) w0.152: J1.11@-5.95,1.6 -5.916,1.634 -5.291,1.634 -3.823,3.102 -3.823,3.308 v1(-3.756,3.375)
S3: dust-sensor-2.28 J1.10 pad.@4.381,-8.75 | length 27.9
  Top Layer (Signal) w0.152: dust-sensor-2.28 2.804,-5.333 3.065,-5.595 4.48,-5.595 v1(4.5,-5.575) 5.075,-5 6.175,-5 6.806,-5.631 6.806,-6.429 4.486,-8.75 pad.@4.381,-8.75
  Layer 2 (Signal) w0.152: v1(-3.129,3.389) -3.063,3.323 -2.72,3.323 -2.575,3.177 1.254,3.177 4.519,-0.088 4.519,-5.556 v1(4.5,-5.575)
  Bottom Layer (Signal) w0.152: J1.10@-5.7,1.2 -5.275,1.2 -3.129,3.346 v1(-3.129,3.389)
S4: dust-sensor-2.29 J1.9 pad.@2.197,-8.75 | length 32.7
  Top Layer (Signal) w0.152: dust-sensor-2.29 2.688,-5.663 3.125,-6.1 4.794,-6.1 5.238,-5.657 v1@5.238,-5.575 ; pad.@2.2,-8.75 3.05,-8.75 3.728,-8.072 4.804,-8.072 6.425,-6.451 6.425,-5.65 6.15,-5.375 5.78,-5.375 5.646,-5.508 5.291,-5.508 v1(5.225,-5.575)
  Layer 2 (Signal) w0.152: v1(-5.725,3.375) -5.225,3.875 -2.9,3.875 -2.497,3.472 1.408,3.472 4.773,0.106 4.773,-5.124 v1(5.225,-5.575)
  Bottom Layer (Signal) w0.152: J1.9@-5.925,0.825 -5.934,0.834 -6.227,0.834 -6.306,0.912 -6.324,0.912 -6.475,1.064 -6.475,2.625 v1(-5.725,3.375)
SEL: dust-sensor-2.25 J1.13 pad.@8.75,-6.808 | length 24.4
  Top Layer (Signal) w0.152: dust-sensor-2.25 2.763,-4.343 2.806,-4.3 v1@2.925,-4.3 ; v1(2.925,-4.275) 2.945,-4.255 3.569,-4.255 3.774,-4.05 6.484,-4.05 7.555,-5.121 7.721,-5.121 8.7,-6.1 pad.@8.7,-6.825
  Layer 2 (Signal) w0.152: v1(-5.067,3.374) -4.147,2.453 -3.85,2.453 -3.812,2.415 0.702,2.415 3.528,-0.411 3.528,-3.672 v1(2.925,-4.275)
  Bottom Layer (Signal) w0.152: J1.13 -5.913,2.407 -5.468,2.407 -5.108,2.767 -5.108,3.333 v1(-5.067,3.374)
SPI_CS: J1.16 U2.6 | length 16.6
  Layer 2 (Signal) w0.152: v1(-8.65,-1.6) -8.612,-1.6 -7.575,-2.637 -7.575,-4.232 -7.118,-4.689 -5.97,-4.689 -4.141,-6.518 0.318,-6.518 1.315,-7.515 1.515,-7.515 1.76,-7.76 v1(1.854,-7.76)
  Bottom Layer (Signal) w0.152: v1(-8.65,-1.6) J1.16@-7.6,-1.6 ; v1(1.854,-7.76) 1.86,-7.76 2.591,-8.491 3.066,-8.491 U2.6
SPI_MISO: J1.15 U2.7 | length 17.9
  Layer 2 (Signal) w0.152: v1(-8.675,-2.275) -7.9,-3.05 -7.9,-3.118 -7.829,-3.189 -7.829,-4.337 -7.223,-4.943 -6.075,-4.943 -4.246,-6.772 0.213,-6.772 1.654,-8.213 2.042,-8.213 2.308,-7.948 2.308,-7.489 2.05,-7.232 v1(2.05,-7.138)
  Bottom Layer (Signal) w0.152: v1@-8.655,-2.226 -8.351,-2.226 -8.125,-2 J1.15 ; v1(2.05,-7.138) 2.05,-7.232 2.249,-7.431 2.249,-7.514 2.324,-7.588 2.324,-7.649 2.651,-7.976 3.051,-7.976 U2.7
SPI_SCK: J1.14 U2.8 | length 18.9
  Layer 2 (Signal) w0.152: v1(-8.675,-2.95) -8.199,-3.426 -8.199,-4.326 ; -8.2,-4.325 -7.328,-5.197 -6.262,-5.197 -4.433,-7.026 0.101,-7.026 1.542,-8.467 2.215,-8.467 2.562,-8.121 2.562,-6.837 v1(2.2,-6.475)
  Bottom Layer (Signal) w0.152: v1@-8.623,-3 -8.623,-2.992 -8.514,-2.884 -8.506,-2.884 -8.056,-2.433 -7.708,-2.433 J1.14@-7.65,-2.375 ; v1@2.175,-6.475 2.175,-6.52 2.503,-6.849 2.503,-7.328 2.651,-7.476 3.051,-7.476 U2.8
TV+: C2.1 C4.1 dust-sensor-2.4 dust-sensor-2.5 pad.@-4.861,5 R12.1 U1.9 U1.10 | length 44
  Top Layer (Signal) w0.254: v1(-6.275,-5.825) -6.322,-5.778 -6.322,-5.428 -6.636,-5.114 -6.861,-5.114 -8.05,-3.925 -8.05,0.175 -8.4,0.525 -8.4,3.607 -7.85,4.157 -7.85,5.325 -6.854,6.321 -5.471,6.321 -4.875,5.725 pad.@-4.875,5 ; pad.@-4.861,5 -4.827,5.034 -3.984,5.034 v1(-3.95,5.068) ; dust-sensor-2.4 0.4,3.75 0.25,3.9 v1(0.25,5.05) 0.65,5.05 0.95,4.75 dust-sensor-2.5
  Layer 2 (Signal) w0.254: v1(-3.95,5.068) -3.941,5.059 0.241,5.059 v1(0.25,5.05)
  Bottom Layer (Signal) w0.254: C4.1 -6.517,-5.65 -6.342,-5.825 v1(-6.275,-5.825) -6.273,-5.827 -6.273,-6.627 -6.25,-6.65 U1.10@-6.15,-6.65 ; -6.15,-6.973 U1.10@-6.15,-6.65 ; -6.148,-6.975 -6.15,-6.977 -6.15,-7.127 -6.127,-7.15 U1.9 ; U1.10 U1.10@-6.15,-6.65 ; C2.1@-0.85,3.102 -0.174,3.102 -0.025,3.251 -0.025,4.775 v1(0.25,5.05) ; v1@0.275,5.05 4.275,5.05 4.9,4.425 4.9,1.683 4.5,1.283 R12.1
V_Ra: dust-sensor-2.11 pad.@8.75,5 R21.1 | length 14.7
  Top Layer (Signal) w0.152: dust-sensor-2.11 4.473,0.277 5.2,-0.45 5.2,-1.496 v1(5.504,-1.8) 6.075,-1.8 6.625,-1.25 6.625,3.475 7.425,4.275 8.025,4.275 pad.@8.75,5
  Bottom Layer (Signal) w0.152: v1(5.504,-1.8) 6.2,-1.8 R21.1
V_Rb: dust-sensor-2.10 pad.@6.806,5 R17.1 R18.2 | length 11.4
  Top Layer (Signal) w0.152: dust-sensor-2.10 4.858,0.607 v1(5.504,-0.039) 5.986,-0.039 6.35,0.325 6.35,4.544 6.731,4.925 pad.@6.8,4.925
  Bottom Layer (Signal) w0.152: v1(5.504,-0.039) 6.214,-0.039 R18.2@6.225,-0.05 ; R17.1 R18.2@6.225,-0.025
VDD_3.3V: C3.2 C8.1 C10.2 C11.2 C12.2 C13.2 dust-sensor-2.13 dust-sensor-2.16 dust-sensor-2.21 J1.23 L1.1 pad.@-8.75,8.55 R6.2 R7.2 R8.2 R17.2 R19.2 R21.2 R22.2 U1.1 U1.2 U1.3 U1.6 U2.9 U2.10 | length 37.5
  Top Layer (Signal) w0.2: pad.@-8.75,8.525 -8.725,8.525 v1(-8.025,7.825) ; dust-sensor-2.21 1.812,-3.035 3.013,-3.035 v1(3.025,-3.047) ; dust-sensor-2.16 2.202,-1.373 2.494,-1.081 v1@2.494,-0.381 ; dust-sensor-2.13 1.804,-0.387 2.488,-0.387 v1@2.5,-0.375
  Bottom Layer (Signal) w0.2: v1(-9.175,3.075) -8.375,2.275 -8.375,1.475 -8.11,1.21 -7.64,1.21 J1.23 ; v1(-8.025,7.825) -8,7.8 -5.2,7.8 v1(-5.175,7.775) -4.095,7.775 L1.1 ; U1.6 -5.911,-8.65 -5.861,-8.7 -5.861,-8.983 -5.5,-9.344 v1(-5.5,-9.425) ; U1.2@-2.775,-7.15 -2.75,-7.15 -1.66,-7.15 -1.499,-6.989 -1.499,-6.667 -1.381,-6.55 0.75,-6.55 C8.1@1.05,-6.85 ; C13.2 v1(-1.65,7.775) -1.569,7.775 -1.469,7.875 R8.2 ; C12.2 C11.2 C10.2 3.43,3.25 v1(4.2,3.25) ; C8.1 C8.1@1.05,-6.85 ; U2.10@2.95,-6.5 2.85,-6.5 2.8,-6.5 2.8,-6.25 2.548,-5.998 1.55,-5.998 ; v1(3.025,-3.047) 3.025,-3.05 1.55,-4.525 1.55,-5.998 ; C8.1@1.05,-6.85 1.05,-6.475 1.527,-5.998 1.55,-5.998
  Bottom Layer (Signal) w0.254: U1.2 -2.75,-7.15 -2.727,-7.173 U1.3@-2.727,-7.681 ; -2.777,-6.975 -2.775,-6.977 U1.2@-2.775,-7.15 ; -2.775,-6.95 U1.1@-2.775,-6.65 ; U2.9@2.85,-7.05 U2.10@2.85,-6.55 ; v1(5.825,8.55) 5.872,8.503 5.872,7.977 5.974,7.875 R6.2 ; v1@7.275,-2.7 R21.2 R17.2@7.275,-0.95 ; R22.2 R19.2@7.275,1.75 ; R19.2 7.285,1.765 7.99,1.765 v1@8,1.775
  other v1: 7.275,-2.675 2.508,-0.391 7.975,1.775
VREF_3.3V: C1.1 C14.2 dust-sensor-2.1 L1.2 pad.@-8.75,6.75 R15.2 R16.2 | length 47.2
  Top Layer (Signal) w0.2: pad.@-8.75,6.75 -8.738,6.737 -7.562,6.737 v1(-7.55,6.725) -4.775,6.725 -1.25,3.2 dust-sensor-2.1
  Layer 2 (Signal) w0.2: v1(-7.55,6.725) -4.775,6.725 -3.577,5.527 7.923,5.527 9.002,4.448 9.002,-1.248 8.6,-1.65 8.6,-2.925 7.814,-3.711 7.814,-4.011 v1(7.775,-4.05)
  Bottom Layer (Signal) w0.2: v1(-7.55,6.725) -7.469,6.725 -7.144,6.4 L1.2 ; C14.2 -2.723,6.832 -3.118,6.832 -3.322,6.628 -3.772,6.628 L1.2 ; C1.1 -2.05,3.09 -2.26,3.3 -2.365,3.3 -2.7,3.634 -2.7,4.5 -3.783,5.583 -3.783,6.183 L1.2 ; R15.2 6.062,-4.137 6.863,-4.137 6.913,-4.088 7.738,-4.088 v1(7.775,-4.05)
VT_high: dust-sensor-2.6 pad.@6.806,6.75 R7.1 R8.1 R11.2 | length 13.5
  Top Layer (Signal) w0.152: dust-sensor-2.6 1.5,5.175 2.675,6.35 5.325,6.35 v1@5.763,6.787 ; v1(5.775,6.775) 5.788,6.762 6.763,6.762 pad.@6.775,6.75
  Bottom Layer (Signal) w0.152: R7.1 R8.1 R11.2 2.725,6.8 5.725,6.8 v1@5.775,6.75
VT_low: dust-sensor-2.7 pad.@8.75,6.75 R6.1 R9.2 R10.2 | length 15.4
  Top Layer (Signal) w0.152: dust-sensor-2.7 2.061,1.6 2.15,1.689 2.15,5.325 2.7,5.875 v1(9,5.875) ; pad.@8.75,6.725 8.912,6.563 8.912,6.057 9,5.969 v1(9,5.875) ; v1@8.865,6.01 v1(9,5.875)
  Bottom Layer (Signal) w0.152: R6.1 R10.2 8.5,6.375 v1(9,5.875)
pads on no net: U1.4

## Polygon pours and split planes (outlines as drawn)
GND on Layer 1 (GND) "GND2 bottom layer" (solid, pour order 2): 9.75,8.646 ccw(c8.896,8.646) 9.5,9.25 ccw(c8.293,8.043) 8.293,9.75 -8.293,9.75 ccw(c-8.293,8.043) -9.5,9.25 ccw(c-8.896,8.646) -9.75,8.646 -9.75,-8.293 ccw(c-8.043,-8.293) -9.25,-9.5 ccw(c-8.646,-8.896) -8.646,-9.75 8.5,-9.75 ccw(c8.5,-8.543) 9.354,-9.396 9.5,-9.25 ccw(c8.896,-8.646) 9.75,-8.646 9.75,8.75
GND on Layer 1 (GND) "GND2 bottom layer" (solid, pour order 10): 8.646,9.75 cw(c8.646,8.896) 9.25,9.5 9.396,9.354 cw(c8.543,8.5) 9.75,8.5 9.75,-8.75 cw(c9.146,-8.75) 9.573,-9.177 9.354,-9.396 cw(c8.5,-8.543) 8.5,-9.75 -8.293,-9.75 cw(c-8.293,-8.043) -9.5,-9.25 cw(c-8.896,-8.646) -9.75,-8.646 -9.75,8.293 cw(c-8.043,8.293) -9.25,9.5 cw(c-8.646,8.896) -8.646,9.75 -8,9.75
GND on Layer 4 (GND) "GND2 bottom layer" (solid, pour order 8): -8.293,9.75 ccw(c-8.293,8.043) -9.5,9.25 ccw(c-8.896,8.646) -9.75,8.646 -9.75,-8.5 ccw(c-8.543,-8.5) -9.396,-9.354 -9.25,-9.5 ccw(c-8.646,-8.896) -8.646,-9.75 8.5,-9.75 ccw(c8.5,-8.543) 9.354,-9.396 9.5,-9.25 ccw(c8.896,-8.646) 9.75,-8.646 9.75,8.75 ccw(c9.146,8.75) 9.573,9.177 9.5,9.25 ccw(c8.293,8.043) 8.293,9.75
GND on Layer 4 (GND) "GND2 bottom layer" (solid, pour order 12): 8.646,9.75 cw(c8.646,8.896) 9.25,9.5 cw(c8.043,8.293) 9.75,8.293 9.75,-8.5 cw(c8.543,-8.5) 9.396,-9.354 9.25,-9.5 cw(c8.646,-8.896) 8.646,-9.75 -8.5,-9.75 cw(c-8.5,-8.543) -9.354,-9.396 -9.5,-9.25 cw(c-8.896,-8.646) -9.75,-8.646 -9.75,8.5 cw(c-8.543,8.5) -9.396,9.354 -9.25,9.5 cw(c-8.646,8.896) -8.646,9.75 -5.25,9.75
VDD_3.3V on Layer 3 (PWR) "VDD_3.3 Layer [4]" (solid, pour order 9): -8.646,9.75 ccw(c-8.646,8.896) -9.25,9.5 ccw(c-8.043,8.293) -9.75,8.293 -9.75,-8.5 ccw(c-8.543,-8.5) -9.396,-9.354 -9.25,-9.5 ccw(c-8.646,-8.896) -8.646,-9.75 8.293,-9.75 ccw(c8.293,-8.043) 9.5,-9.25 ccw(c8.896,-8.646) 9.75,-8.646 9.75,8.646 ccw(c8.896,8.646) 9.5,9.25 ccw(c8.293,8.043) 8.293,9.75
VDD_3.3V on Layer 3 (PWR) "GND2 bottom layer" (solid, pour order 11): 8.646,9.75 cw(c8.646,8.896) 9.25,9.5 cw(c8.043,8.293) 9.75,8.293 9.75,-8.646 cw(c8.896,-8.646) 9.5,-9.25 cw(c8.293,-8.043) 8.293,-9.75 -8.293,-9.75 cw(c-8.293,-8.043) -9.5,-9.25 cw(c-8.896,-8.646) -9.75,-8.646 -9.75,8.75 cw(c-9.146,8.75) -9.573,9.177 -9.25,9.5 cw(c-8.646,8.896) -8.646,9.75

## Silkscreen, mask and mechanical layers (free items; w line width, h text height)
Top Overlay:
  drawing of 211 lines, arcs and shapes, not listed
  text "MLB FC" at -9.375,0.425 h0.8 r270
Bottom Overlay:
  rectangle: -4.225,-1.075 -2.225,0.925
  text "11/25" at -8.675,4.575 h1 r270
  text "REV A" at -7.075,4.575 h1 r270